# Altium PCB PCB_5V_7805.PcbDoc
Units mil, origin at the board's own origin, x right, y up, seen from the top; angles counter-clockwise.
Board outline 1550 x 1075 mil, 2 copper layers (Top Layer, Bottom Layer); 9 components, 5 nets, 20 pads, 0 vias.
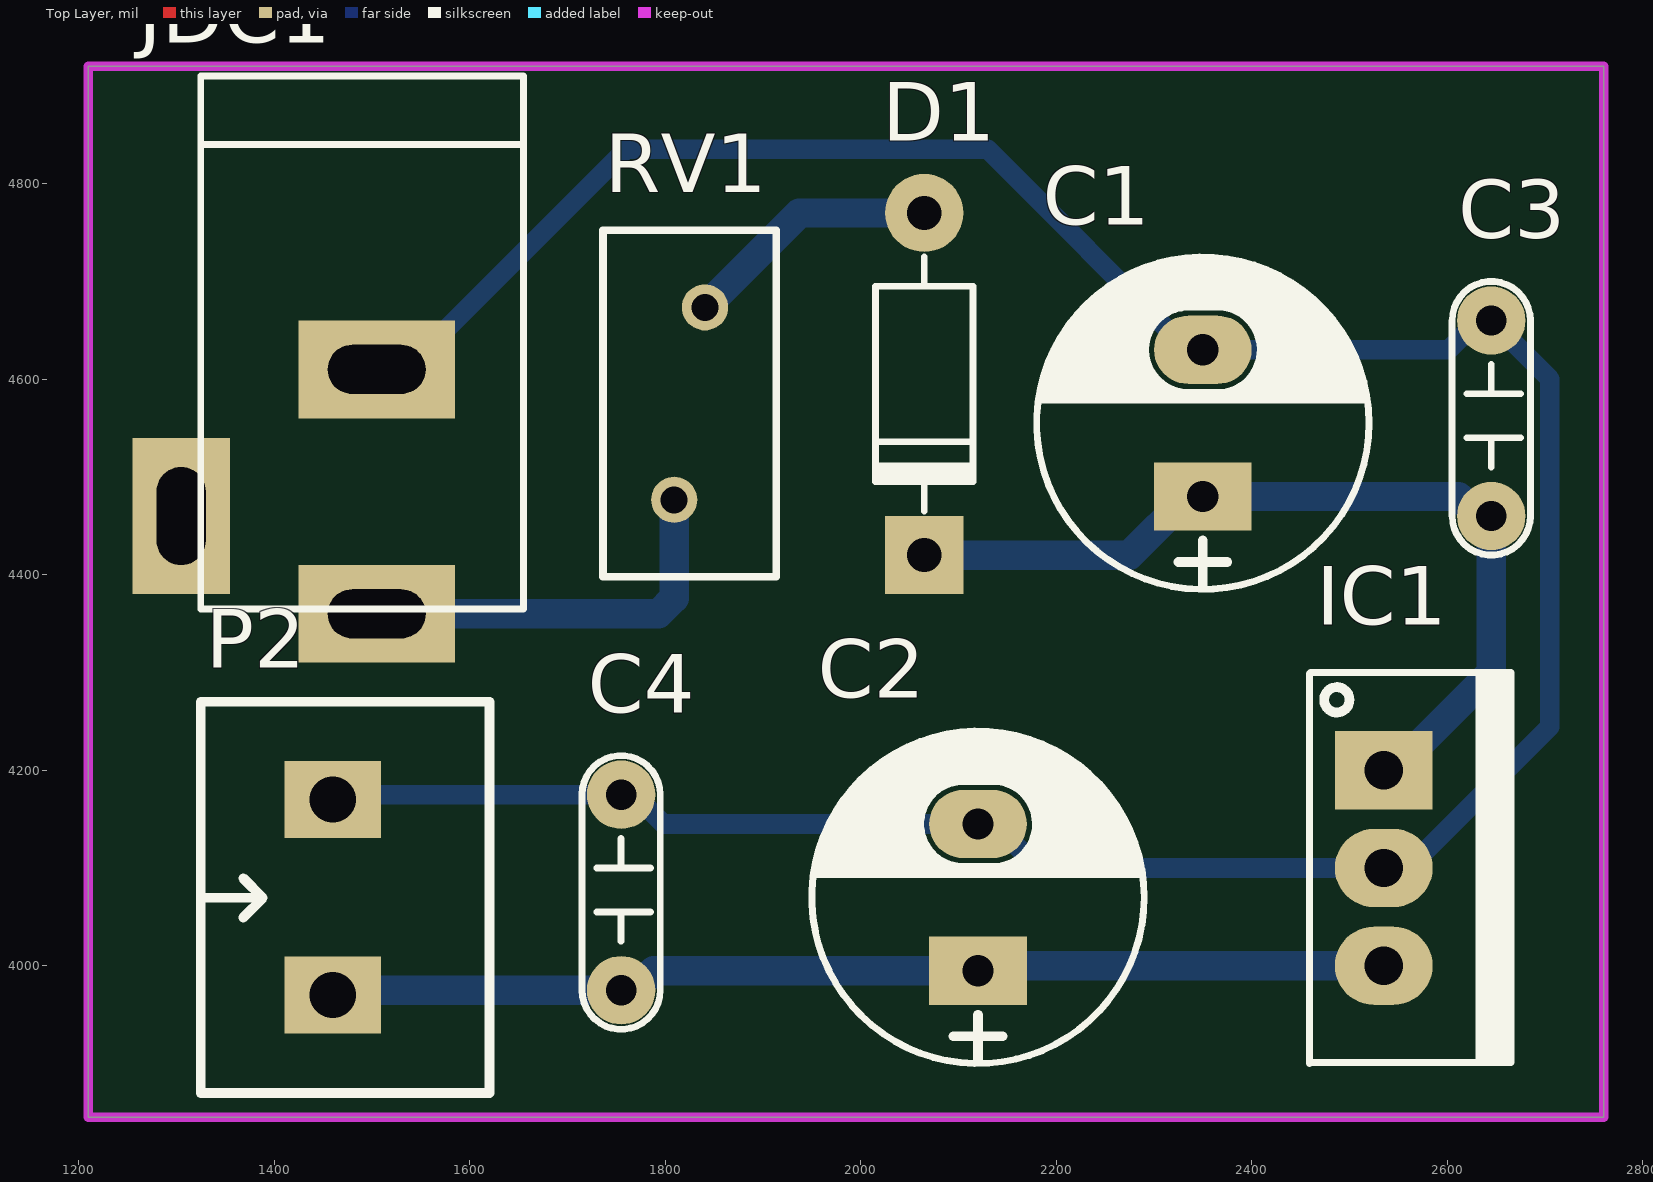
[diagram p0: Top Layer view]
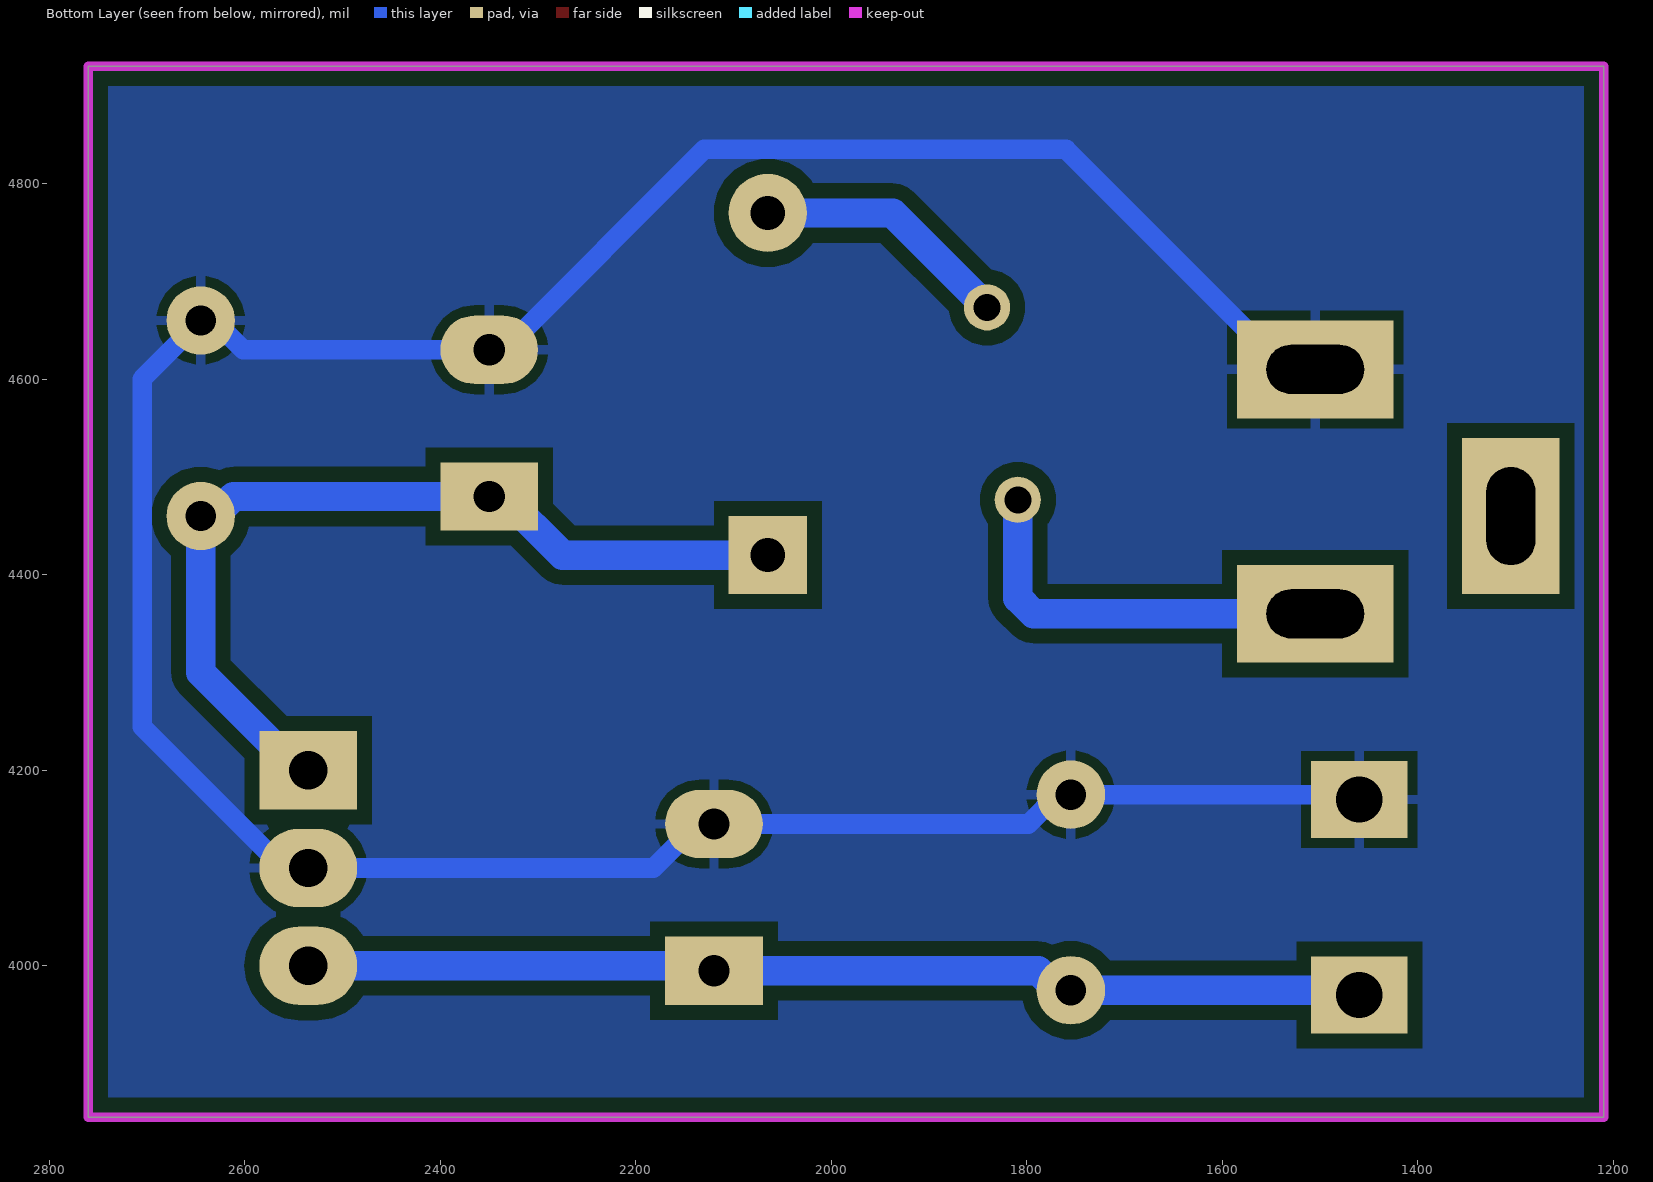
[diagram p1: Bottom Layer view, seen from below]
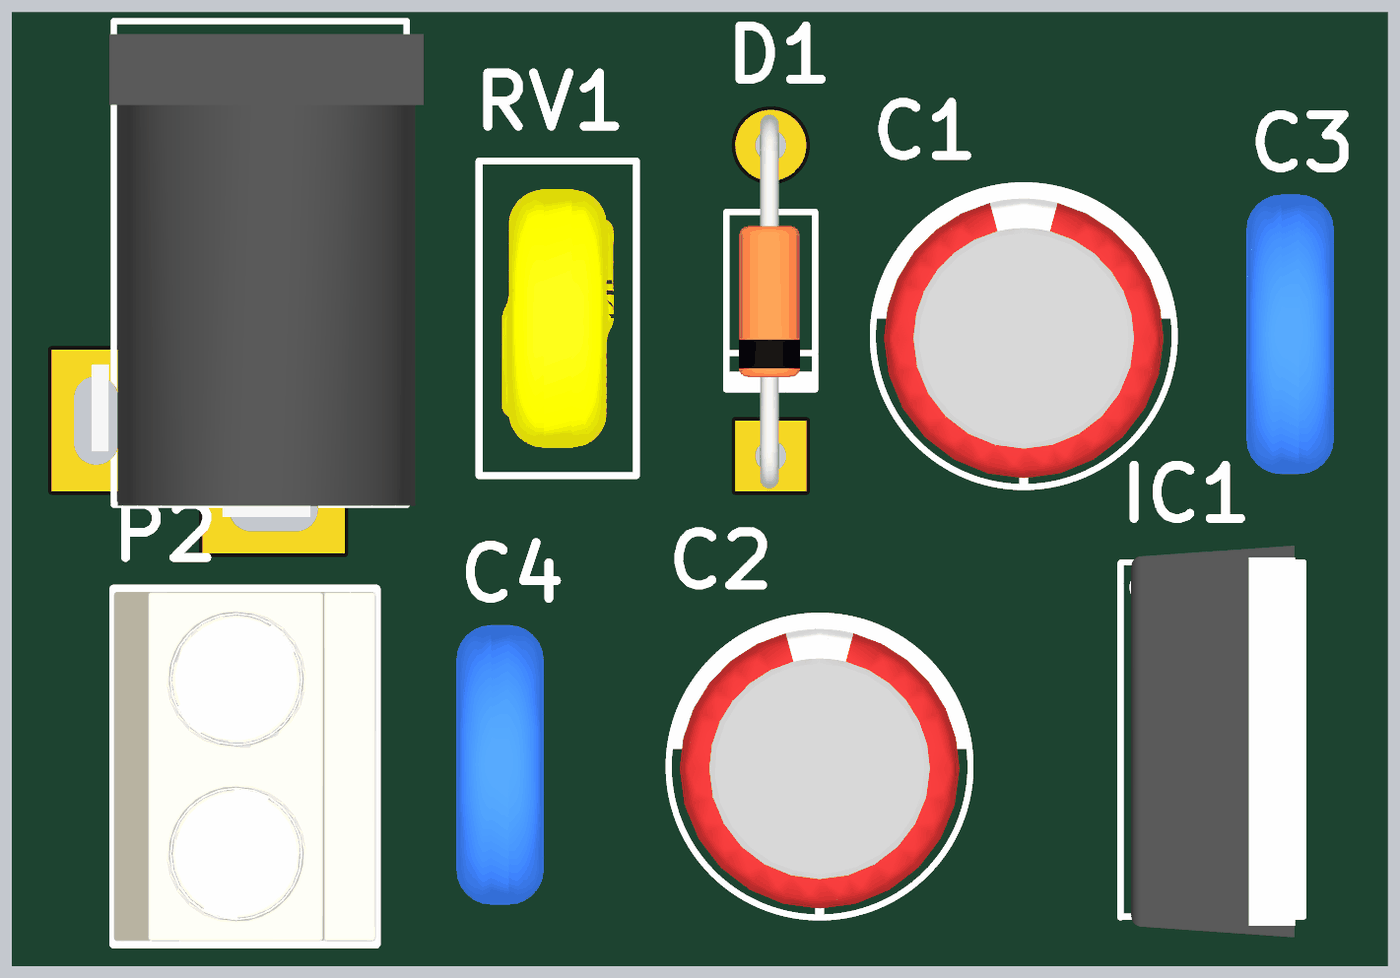
[diagram p2: 3D render of the assembled board from above, using the file's embedded part models]

## Layer stack, top to bottom
Top Solder: solder mask 0.4, Solder Resist, Dk 3.5
Top Layer: signal copper 1.4
Dielectric 1: dielectric 12.6, FR-4, Dk 4.8
Bottom Layer: signal copper 1.4
Bottom Solder: solder mask 0.4, Solder Resist, Dk 3.5

## Board outline
1210,3845 1210,4920 2760,4920 2760,3845

## Design rules (kind name [scope] priority, off if disabled: settings)
Clearance [All] p1: gap=15 ignorepadtopadclearanceinfootprint=FALSE
PolygonConnect [All] p1: connectstyle=Relief reliefconductorwidth=10 reliefentries=4 polygonreliefangle="90 Angle" airgapwidth=10
RoutingVias [All] p1: holewidth=28 width=50 viastyle="Through Hole" minholewidth=28 minwidth=50 maxholewidth=28 maxwidth=50
SolderMaskExpansion [All] p1: expansion=4 istentingtop=FALSE
Width [All] p1: maxlimit=30 minlimit=10 preferedwidth=20
30 further rules are at their usual default settings.

## Components (designator, comment, footprint, x,y, rotation, side; value= is the part's Value field where it differs from the comment)
C1 "1000uF/16V" CP1.5/3.4 2350,4480 r90 top
C2 "1000uF/16V" CP1.5/3.4 2120,3995 r90 top
C3 "104" CN2 2645,4660 r270 top value=0.1uF
C4 "104" CN2 1755,4175 r270 top value=0.1uF
D1 "Diode" D1A 2065,4770 r90 top
IC1 "LM7805" QTO-220 2535,4200 r270 top
JDC1 "Jac DC" DC-IN 1405,4485 r270 top
P2 "Domino 2" "DOMINO 2- 5mm" 1460,4070 r90 top
RV1 "14VAC, 18VDC" D9W4.5H12P0.8 1825,4575 r90 top

## Footprints (in the part's own frame and the unit in brackets; to place one, negate y for a bottom-side part, rotate by r counter-clockwise, add the part's x,y. Pads: shape width x height; smd on the part's side, far side on the other; paste and mask are expansions set on the pad)
CN2 [mil]
  round 70 hole 31: 1(0,0) 2(200,0)
  silkscreen extent -40,-40 240,40, body extent -54,-44 260,55, height 407
CP1.5/3.4 [mil] "Tu hoa 220->470uF,16V, 470uF/16V,25V"
  rect 70x100 hole 32: 1(0,0)
  oval 70x100 hole 32: 2(150,0)
  silkscreen extent -95,-170 245,170, body extent -85,-157 230,157, height 446
D1A [mil] "Diode 1N4007, W 100mil, L 350mil"
  round 80 hole 35: 1(0,0)
  rect 80x80 hole 35: 2(-350,0)
  silkscreen extent -305,-50 -45,50, body extent -386,-33 34,36, height 84
D9W4.5H12P0.8 [mm] "Disk Varistor, Diameter 9mm, Width 4.5mm"
  round 1.2 hole 0.7: 1(-2.5,0.4) 2(2.5,-0.4)
  silkscreen extent -4.5,-2.25 4.5,2.25, body extent -3.7,-1.6 3.7,1.6, height 9.7
DC-IN [mil] "Jac DC input"
  rect 100x160 hole 50 slot 100 at 90 deg: 1(125,100) 2(-125,100)
  rect 160x100 hole 50 slot 100 at 0 deg: 3(25,-100)
  silkscreen extent -425,-80 120,250, body extent -410,-105 134,269, height 434
"DOMINO 2- 5mm" [mm]
  rect 2x2.5 hole 1.2: 1(-2.54,0) 2(2.54,0)
  silkscreen extent -5.08,-4.08 5.08,3.43, body extent -5,-4.07 5,3.43, height 10
QTO-220 [mil] "TO-220 - 1-2-3"
  rect 80x100 hole 39: 1(0,0)
  oval 80x100 hole 39: 2(100,0) 3(200,0)
  silkscreen extent -100,-76 300,130, body extent -119,-64 322,121, height 755

## Part data
C1 C2: library part CP4, "Cap 1000uF/16V - 220uF/50V", Description 1="2200uF-3300uF/6,3V - 1000uF-2200uF/10V", Description 2="1000uF/16V - 470uF => 1000uF/25V - 100uF/100V", Description 3=330uF>470uF/35V_220uF>470uF/50V_10uF>22uF/250V, Description 4="220uF => 330uF/63V - 10uF =>33uF/160 - 200V", Description 5="4,7uF>10uF/250V_3,3uF>10uF/400V - 2,2uF>4,7uF/450V"
C3 C4: library part CN2, "Cap np 104 => 105pF"
D1: "Default Diode"
IC1: library part LM78xx, "On ap +, from + 5 to + 24VDC"
JDC1: library part DCIN, "Jac DC input"
P2: "Domino, 2-Pin", LatestRevisionDate=17-Jul-2002, LatestRevisionNote="Re-released for DXP Platform.", Publisher="Altium Limited"
RV1: library part 820571406, "WE-VD Disk Varistor, THT, 14VAC, 18VDC, 2930pF", (Reverse) Breakdown Voltage=22V, (Reverse) Peak Pulse Current=250A, Channel Input Capacitance=2930pF, Clamping Voltage=43V, Manufacturer="Wurth Elektronik", Operating Temperature Max=85°C, Operating Temperature Min=-40°C, Operating Voltage (AC)=14V, Operating Voltage (DC)=18V, Power Dissipation=0.02W, Category="Surge Protection", ComponentLink1Description="Website Link", ComponentLink1URL=https://www.we-online.com/redexpert/article/820571406?ad, ComponentLink2Description="Datasheet Link", ComponentLink2URL=https://www.we-online.com/redexpert/spec/820571406?ad, Diameter=9mm, Energy Absorption=1.4J, Height=12mm, Manufacturer Part Number=820571406, Match Code=WE-VD, Mount="Through Hole", Packaging="Tape and Reel", Pitch=0.8mm, Width=4.5mm

## Nets (pads, with @x,y where several pads share a name; then routed paths per layer and width w, separated by ;. In a path a pad name is that pad's centre, name@x,y a point inside that pad or via, vN(x,y) a via of type N, cw(c..) or ccw(c..) an arc to the next point about the centre after c; other vN are vias at no path point)
GND: C1.2 C2.2 C3.1 C4.1 IC1.2 JDC1.2 P2.2 | length 3108.8
  Bottom Layer w20: P2.2 1465,4175 C4.1 1768.53,4175 1798.53,4145 C2.2 2136.92,4145 2181.92,4100 IC1.2 2560.36,4100 2705,4244.64 2705,4600 C3.1 2631.47,4660 2601.47,4630 C1.2 2335,4630 2130,4835 1760,4835 1535,4610 JDC1.2
NetC2_1: C2.1 C4.2 IC1.3 P2.1 | length 1087.4
  Bottom Layer w30: P2.1 1465,3975 C4.2 1768.53,3975 1788.53,3995 C2.1 2125,4000 IC1.3
NetD1_1: D1.1 RV1.2 | length 264.3
  Bottom Layer w30: RV1.2 1937.32,4770 D1.1
NetJDC1_1: JDC1.1 RV1.1 | length 411.5
  Bottom Layer w30: JDC1.1 1793.28,4360 1809.25,4375.97 RV1.1
VCC: C1.1 C3.2 D1.2 IC1.1 | length 924.6
  Bottom Layer w30: D1.2 2275,4420 2335,4480 C1.1 2611.47,4480 2631.47,4460 C3.2 2645,4300 2545,4200 IC1.1
pads on no net: JDC1.3

## Polygon pours and split planes (outlines as drawn)
GND on Bottom Layer "GND_L02_P000" (solid, remove dead copper, pour order 0): 1210,3845 1210,4920 2760,4920 2760,3845

## Keep-outs
Keep-Out Layer:
  the board outline again, w10

## Dimensions
2760,4920 to 2760,3845 on Dimensions
1210,4920 to 2760,4920 on Dimensions

## Panel: embedded boards
"" at 755,5215, 1 rows x 1 columns, spacing 2500 x 1500, rotation 0